# Altium PCB tecctrl.PcbDoc
Units mil, origin at the board's own origin, x right, y up, seen from the top; angles counter-clockwise.
Board outline 3900 x 3000 mil, 2 copper layers (Top Layer, Bottom Layer); 56 components, 34 nets, 150 pads, 17 vias.
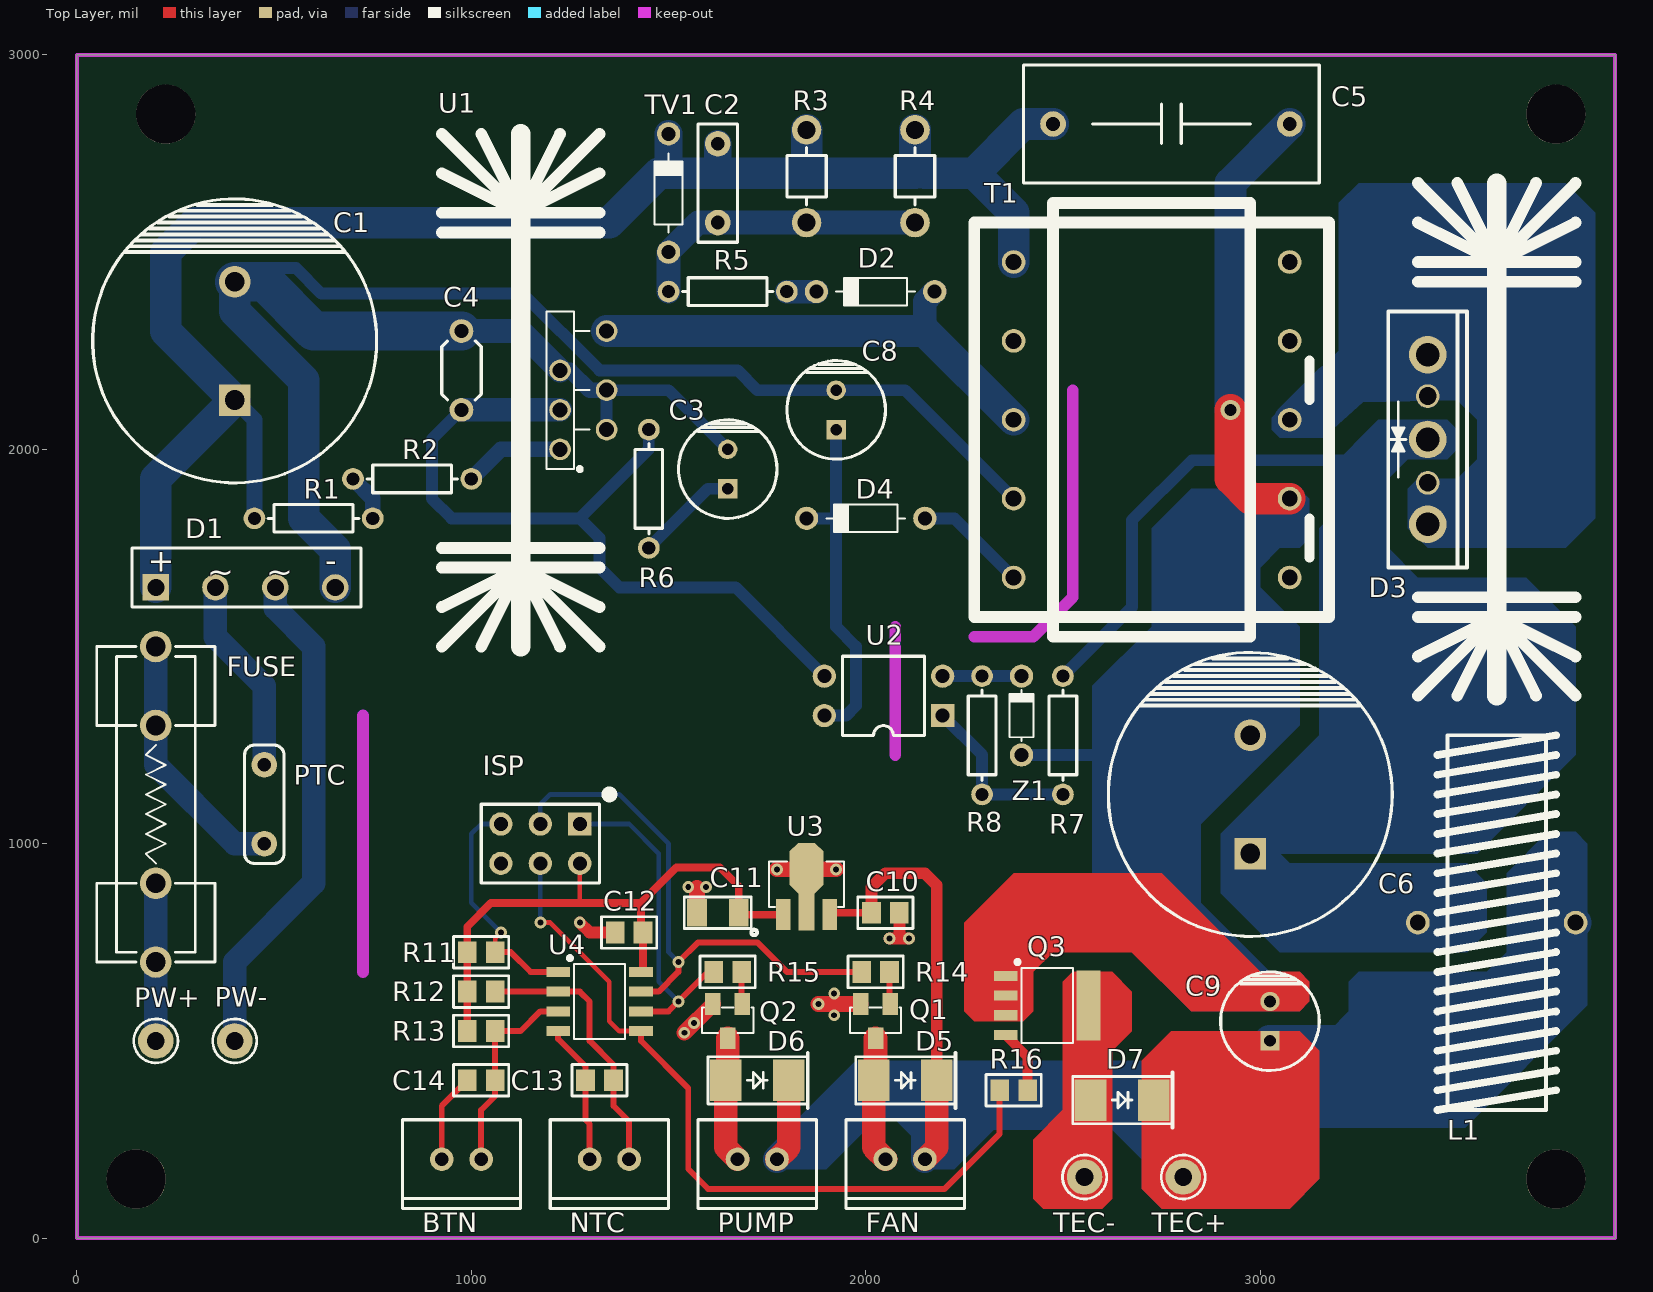
[diagram p0: Top Layer view]
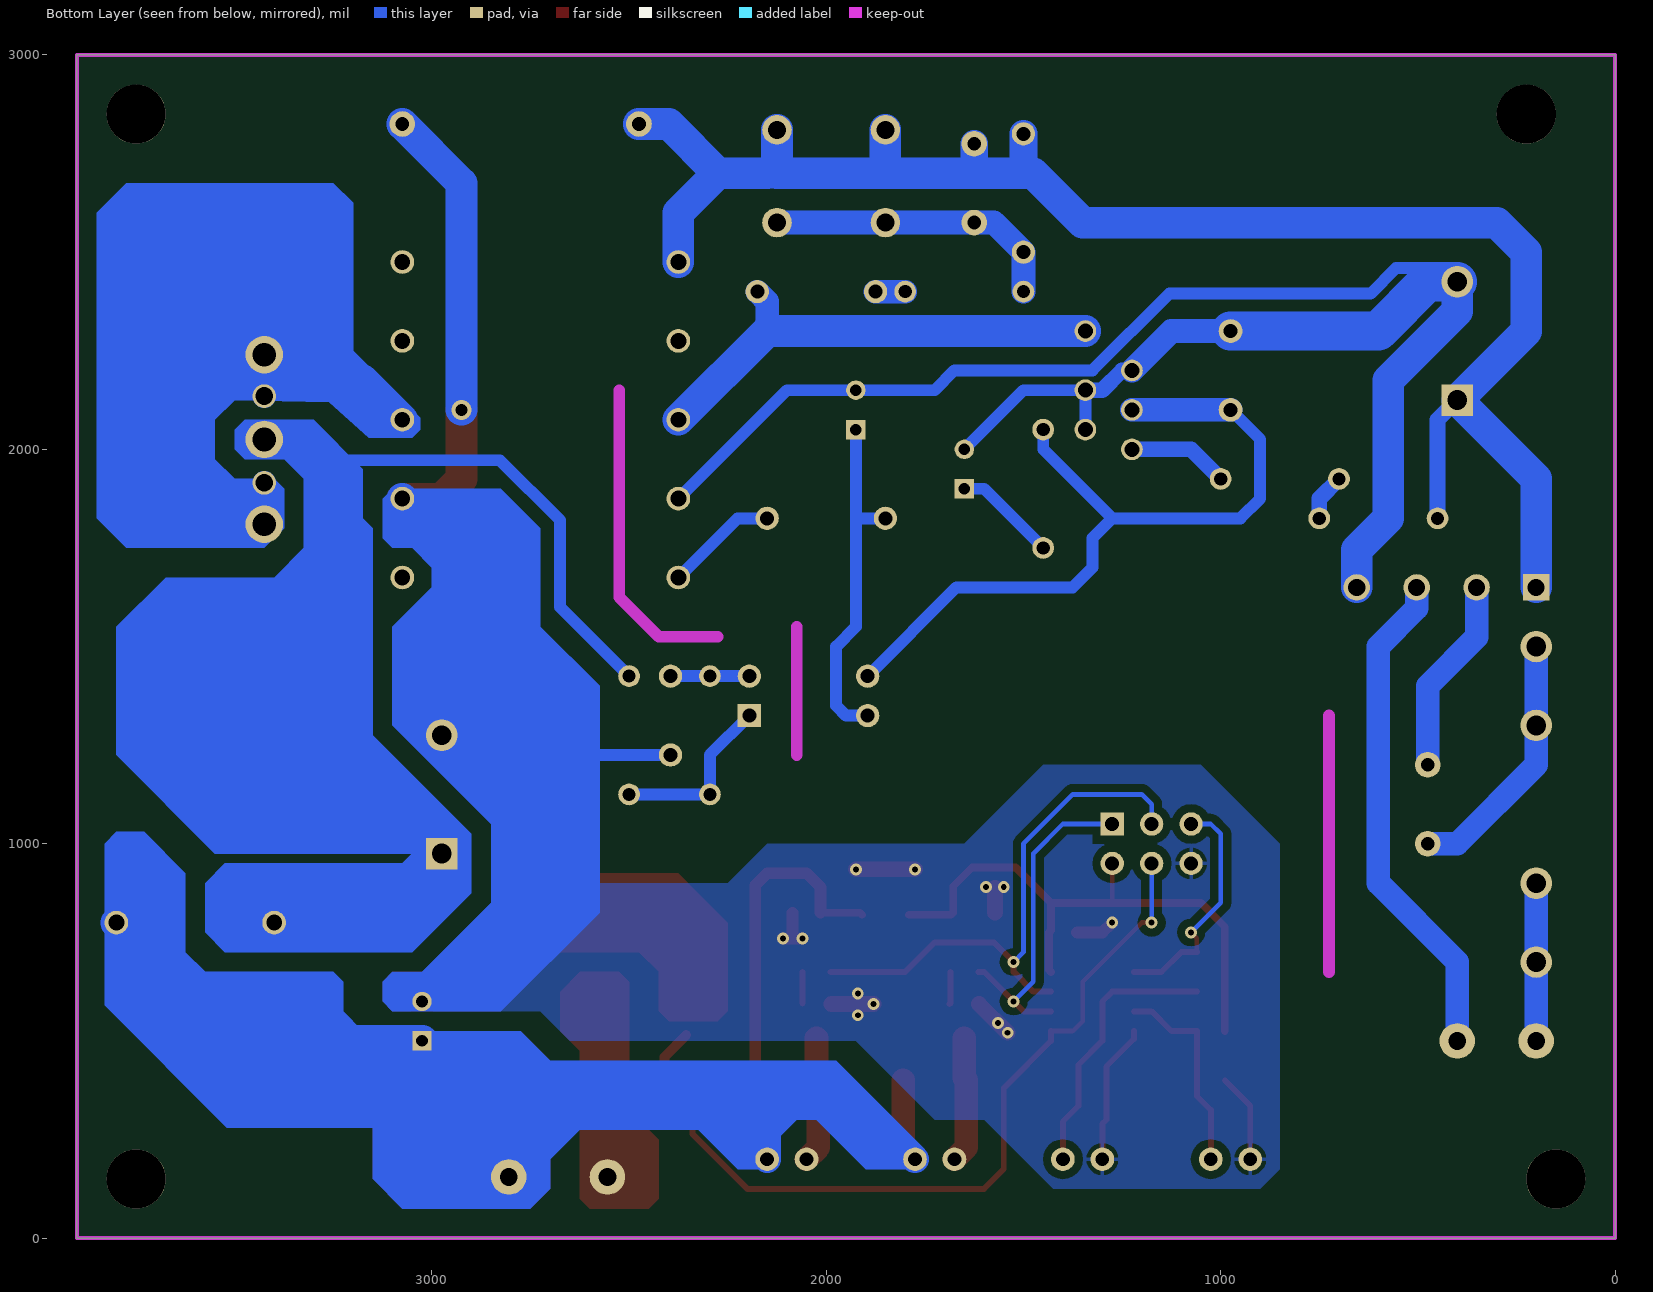
[diagram p1: Bottom Layer view, seen from below]

## Layer stack, top to bottom
Top Layer: signal copper 1.4
Dielectric: dielectric 12.6, FR-4, Dk 4.8
Bottom Layer: signal copper 1.4

## Board outline
0,0 3900,0 3900,3000 0,3000 0,0

## Design rules (kind name [scope] priority, off if disabled: settings)
Clearance [All] p1: gap=10
Height [All] p1: minheight=0 maxheight=2000 prefheight=500
HoleSize [All] p1: absolutevalues=TRUE maxlimit=200 minlimit=5 maxpercent=80.000 minpercent=20.000
MinimumSolderMaskSliver [All] p1: minsoldermaskwidth=5
PolygonConnect [All] p1: connectstyle=Relief reliefconductorwidth=10 reliefentries=4 polygonreliefangle="90 Angle" airgapwidth=10
RoomDefinition power [InComponentClass('power')] p1: confinementstyle=ConfineOut formatcopy=TRUE lockcomponents=FALSE outline 4000,1400 4600,1400 4600,2400 4000,2400
RoomDefinition control [InComponentClass('control')] p2: confinementstyle=ConfineOut formatcopy=TRUE lockcomponents=FALSE outline 4000,0 4600,0 4600,1000 4000,1000
RoutingVias [All] p1: holewidth=28 width=50 viastyle="Through Hole" minholewidth=28 minwidth=50 maxholewidth=28 maxwidth=50
SilkToSilkClearance [All] p1 off: silktosilkclearance=10
SilkToSolderMaskClearance [IsPad] p1 off: minsilkscreentomaskgap=1 clearancetoexposedcopper=TRUE
SolderMaskExpansion [All] p1: expansion=4
Width [All] p1: maxlimit=200 minlimit=10 preferedwidth=10
23 further rules are at their usual default settings.

## Classes and differential pairs
component class power: C1 C3 C4 C5 C6 C8 C9 D1 D2 D3 D4 FUSE L1 PTC PW+ PW- R1 R2 R3 R4 R5 R6 R7 R8 T1 TV1 U1 U2 Z1
component class control: BTN C10 C11 C12 C13 C14 D5 D6 D7 FAN ISP NTC PUMP Q1 Q2 Q3 R11 R12 R13 R14 R15 R16 TEC+ TEC- U3 U4

## Components (designator, comment, footprint, x,y, rotation, side; value= is the part's Value field where it differs from the comment)
BTN "" JST2 975,200 r180 top
C1 "450V68uF" CAP_18x30 400,2275 r90 top
C2 "3.9n1kV" CAP7 1625,2675 r270 top
C3 "47u10V" CAP3 1650,1950 r90 top
C4 "0.1u16V" CAP6 975,2200 r90 top
C5 "330nF" CAP_MKP 2775,2825 r0 top
C6 "2200uF25V" CAP_18x30 2975,1125 r90 top
C8 "10u50V" CAP3 1925,2100 r90 top
C9 "100uF25V" CAP3 3025,550 r90 top
C10 "50V0.1uF" CAP0805 2050,825 r0 top
C11 "10uF16V" CAP1206 1625,825 r180 top
C12 "50V0.1uF" CAP0805 1400,775 r180 top
C13 "50V0.1uF" CAP0805 1325,400 r180 top
C14 "50V0.1uF" CAP0805 1025,400 r180 top
D1 "KBP210" KBP310 200,1650 r0 top
D2 "FR107" DIO1 2025,2400 r180 top
D3 "MBR2080CT" TO247_TO220_SINK 3425,2025 r270 top
D4 "FR107" DIO1 2000,1825 r180 top
D5 "FR107" DO214AC 2100,400 r0 top
D6 "FR107" DO214AC 1725,400 r0 top
D7 "FR107" DO214AC 2650,350 r0 top
FAN "" JST2 2100,200 r180 top
FUSE "5A" FUSE5X20 200,700 r90 top
ISP "Header 3X2" HDR2X3 1275,1050 r180 top
L1 "4.7uH" CHOKE 3600,800 r0 top
NTC "" JST2 1350,200 r180 top
PTC "10D-9" PTC 475,1100 r90 top
PUMP "" JST2 1725,200 r180 top
PW+ "" PAD1 200,500 r0 top
PW- "" PAD1 400,500 r0 top
Q1 "SI2302" SOT23_NMOS 2025,550 r180 top
Q2 "SI2302" SOT23_NMOS 1650,550 r180 top
Q3 "FDS6690AS" SO8-NMOS 2460,590 r270 top
R1 "4.7M" RES0.25W 600,1825 r180 top
R2 "4.7M" RES0.25W 850,1925 r180 top
R3 "29k2W" RES2W_H 1850,2575 r90 top
R4 "29k2W" RES2W_H 2125,2575 r90 top
R5 "5.1R" RES0.25W 1650,2400 r180 top
R6 "6.8" RES0.25W 1450,1900 r90 top
R7 "230R" RES0.25W 2500,1275 r90 top
R8 "1K" RES0.25W 2295,1275 r270 top
R11 "4.7K" RES0805 1025,725 r180 top
R12 "4.7K" RES0805 1025,625 r180 top
R13 "4.7K" RES0805 1025,525 r180 top
R14 "10R" RES0805 2025,675 r180 top
R15 "10R" RES0805 1650,675 r180 top
R16 "10R" RES0805 2375,375 r180 top
T1 "Transformer" EER28 2725,2075 r0 top
TEC+ "" PAD1 2805,155 r270 top
TEC- "" PAD1 2555,155 r270 top
TV1 "P6KE180A" DIO1 1500,2650 r90 top
U1 "TOP266EG" ESIP_SINK 1225,2100 r90 top
U2 "PC817" DIP-4 2045,1375 r90 top
U3 "" SOT89_VREG 1850,820 r0 top
U4 "TINY13A" SO8 1325,600 r270 top
Z1 "12V" DIO2 2395,1325 r90 top

## Footprints (in the part's own frame and the unit in brackets; to place one, negate y for a bottom-side part, rotate by r counter-clockwise, add the part's x,y. Pads: shape width x height; smd on the part's side, far side on the other; paste and mask are expansions set on the pad)
CAP3 [mm] "Capacitor, Electrolytic, Radial; Body 5 x 6.8 mm (Dia.xH typ); Pin Spacing 2 mm (typ)"
  rect 1.25x1.25 hole 0.75: 1(-1.27,0)
  round 1.25 hole 0.75: 2(1.27,0)
  silkscreen extent -3.17,-3.18 3.17,3.17, body extent -3.18,-3.18 3.18,3.18, height 11.53
CAP6 [mil]
  round 60 hole 35: 1(-100,0) 2(100,0)
  silkscreen extent -75,-50 75,50, body extent -108,-50 108,48, height 257
CAP7 [mm]
  round 1.65 hole 0.889: 1(-2.54,0) 2(2.54,0)
  silkscreen extent -3.81,-1.27 3.81,1.27, body extent -4,-1.27 4,1.24, height 10.86
CAP0805 [mm]
  rect 1.2x1.4 smd: 1(-0.9,0) 2(0.9,0)
  silkscreen extent -1.78,-1.02 1.78,1.02, body extent -1,-0.62 1,0.63, height 0.78
CAP1206 [mil]
  rect 50x70 smd: 1(-53,0) 2(53,0)
  silkscreen extent -99,-40 85,57, body extent -67,-33 67,33, height 67
CAP_18x30 [mil]
  rect 80x80 hole 50: 1(-150,0)
  round 80 hole 50: 2(150,0)
  silkscreen extent -360,-360 360,360, body extent -353,-354 356,354, height 1183
CAP_MKP [mm]
  round 1.65 hole 0.889: 1(-7.62,0) 2(7.62,0)
  silkscreen extent -9.53,-3.81 9.53,3.81, body extent -9.5,-4 9.5,4, height 16.67
CHOKE [mil]
  round 60 hole 40: 1(-200,0) 2(200,0)
  silkscreen extent -150,-475 150,475, body extent -234,-500 236,500, height 1100
DIO1 [mm]
  round 1.5 hole 0.9: 1(-3.81,0) 2(3.81,0)
  silkscreen extent -2.54,-0.89 2.54,0.89, body extent -4.22,-1.33 4.19,1.33, height 3.06
DIO2 [mm]
  round 1.5 hole 0.9: 1(-2.54,0) 2(2.54,0)
  silkscreen extent -1.65,-0.76 1.65,0.76, body extent -2.74,-0.84 2.77,0.81, height 1.81
DIP-4 [mm] "DIP; 4 Leads; Row Spacing 7.62 mm; Pitch 2.54 mm"
  rect 1.5x1.5 hole 0.9: 1(-1.27,-3.81)
  round 1.5 hole 0.9: 2(1.27,-3.81) 3(1.27,3.81) 4(-1.27,3.81)
  silkscreen extent -2.55,-2.65 2.55,2.65, body extent -2.75,-3.94 2.79,4.06, height 5.58
DO214AC [mil]
  rect 80x105 smd: 1(-80,0) 2(80,0)
  silkscreen extent -125,-70 128,70, body extent -108,-55 108,55, height 90
EER28 [mil]
  round 60 hole 40: 1(-350,400) 2(-350,200) 3(-350,0) 4(-350,-200) 5(-350,-400) 6(350,-400) 7(350,-200) 8(350,0) 9(350,200) 10(350,400)
  silkscreen extent -450,-550 450,550, body extent -370,-510 370,514, height 937
ESIP_SINK [mil] "TopSwitch JX"
  round 55 hole 38: 1(-100,0) 2(-50,-118.11) 3(0,0) 4(50,-118.11) 5(100,0) 7(200,-118.11)
  silkscreen extent -600,-100 700,300, body extent -616,-140 715,317, height 994
FUSE5X20 [mil]
  round 80 hole 50: 1(0,0) 1(200,0) 2(600,0) 2(800,0)
  silkscreen extent 0,-150 800,150, body extent -10,-152 810,152, height 457
HDR2X3 [mm] "Connector; Header; 3x2 Position"
  rect 1.5x1.5 hole 0.9: 1(0,0)
  round 1.5 hole 0.9: 2(0,2.54) 3(2.54,0) 4(2.54,2.54) 5(5.08,0) 6(5.08,2.54)
  silkscreen extent -2.16,-2.16 6.35,3.81, body extent -1.27,-1.27 6.35,3.81, height 8.79
JST2 [mil]
  round 60 hole 35: 1(-50,0) 2(50,0)
  silkscreen extent -150,-100 150,125, body extent -149,-94 146,134, height 281
KBP310 [mm]
  rect 1.7x1.7 hole 1.1: 1(0,0)
  round 1.7 hole 1.1: 2(3.835,0) 3(7.696,0) 4(11.557,0)
  silkscreen extent -1.52,-1.27 13.21,2.54, body extent -2.03,-1.62 13.97,2.38, height 13.54
PAD1 [mil]
  round 90 hole 45: 1(0,0)
  silkscreen extent -56,-56 56,56
PTC [mm]
  round 1.65 hole 0.889: 1(-2.54,0) 2(2.54,0)
  silkscreen extent -3.81,-1.27 3.81,1.27, body extent -3.96,-2.81 4.03,2.79, height 11.97
RES0.25W [mm] "Resistor; 2 Leads"
  round 1.4 hole 0.85: 1(-3.81,0) 2(3.81,0)
  silkscreen extent -2.92,-0.89 2.92,0.89, body extent -4.06,-0.93 4.06,1.02, height 2.24
RES2W_H [mil] "Resistor; 2 Leads"
  round 75 hole 45: 1(0,0) 2(235,0)
  silkscreen extent 45,-50 190,50, body extent -71,-130 260,130, height 936
RES0805 [mm]
  rect 1.2x1.4 smd: 1(-0.9,0) 2(0.9,0)
  silkscreen extent -1.78,-1.02 1.78,1.02, body extent -1.12,-0.69 1.18,0.66, height 0.76
SO8 [mil]
  rect 25.59x60 smd: 1(-75,-105) 2(-25,-105) 3(25,-105) 4(75,-105) 5(75,105) 6(25,105) 7(-25,105) 8(-75,105)
  silkscreen extent -115,-80 95,65, body extent -96,-118 96,118, height 67
SO8-NMOS [mil]
  rect 177.17x60 smd: D(0,105)
  rect 25.59x60 smd: G(75,-105) S(-75,-105) S(-25,-105) S(25,-105)
  silkscreen extent -115,-80 95,65, body extent -96,-118 96,118, height 67
SOT23_NMOS [mm]
  rect 1x1.4 smd: D(0,1.1) G(-0.95,-1.1) S(0.95,-1.1)
  silkscreen extent -1.65,-0.89 1.65,0.76, body extent -1.5,-1.32 1.5,1.32, height 1.08
SOT89_VREG [mm]
  rect 0.92x2 smd: 1(-1.5,0) 3(1.5,0)
  rect 1.016x2.54 smd: 2(0,0.254)
  oct 2.184x3.251 smd: 2(0,3)
  silkscreen extent -2.41,0.51 2.41,3.43, body extent -2.21,-0.37 2.29,3.93, height 1.51
TO247_TO220_SINK [mil]
  round 95 hole 60: 1(-215,0) 2(0,0) 3(215,0)
  round 60 hole 45: 1(-110,0) 3(110,0)
  silkscreen extent -650,-100 650,375, body extent -665,-94 665,390, height 1484

## Part data
BTN FAN NTC PUMP: library part "Header 2", "Header, 2-Pin"
C1 C3 C6 C8 C9 C11: library part "Cap Pol2", "Polarized Capacitor (Axial)"
C2 C4 C5 C10 C12 C13 C14: library part Cap, "Capacitor"
D1: library part KBP310, "Single Phase Rectifier Bridge"
D2 D4 D5 D6 D7: library part Diode, "1 Amp Fast Recovery Rectifier"
D3: library part Diode2, "Dual Diode TO-247"
FUSE: library part "Fuse 2", "Fuse"
ISP: "Header, 3-Pin, Dual row"
L1: library part Inductor, "Inductor"
PTC R1 R2 R3 R4 R5 R6 R7 R8 R11 R12 R13 R14 R15 R16: library part Res1, "Resistor"
PW+ PW- TEC+ TEC-: library part Header1, "Header, 1-Pin"
Q1 Q2 Q3: library part NMOS, "DUAL MOSFET N"
T1: library part EER28
TV1 Z1: library part "D Zener", "Zener Diode"
U1: library part TOP26xEG, "PI TopSwitch II"
U2: library part Optoisolator1, "4-Pin Phototransistor Optocoupler"
U3: library part 78L05, "Positive Voltage Regulator"
U4: "AVR MCU"

## Free pads (board coordinates)
  round 150 hole 150: ""(150,150) ""(225,2850) ""(3750,150) ""(3750,2850)

## Via types
v1: diameter 30, hole 15, Top Layer to Bottom Layer, 16 vias
v2: diameter 50, hole 30, Top Layer to Bottom Layer, 1 vias

## Nets (pads, with @x,y where several pads share a name; then routed paths per layer and width w, separated by ;. In a path a pad name is that pad's centre, name@x,y a point inside that pad or via, vN(x,y) a via of type N, cw(c..) or ccw(c..) an arc to the next point about the centre after c; other vN are vias at no path point)
5V: C11.1 C12.1 ISP.2 R11.2 R12.2 R13.2 U3.1 U4.8 | length 1496.7
  Top Layer w12: 1275,850 ISP.2
  Top Layer w20: R13.2 R12.2 R11.2 989.57,789.57 1050,850 1275,850 1430,850 ; U4.8 1435.43,680.43 C12.1 1430,780.43 1430,850 ; U3.1 1683,820 C11.1 1678,892 1630,940 1520,940 1430,850
12V: C9.1 C10.1 D5.2 D6.2 D7.2 FAN.1 L1.2 PUMP.1 TEC+.1 U3.3 | length 2892.7
  Top Layer w20: U3.3 1914.06,825 C10.1
  Top Layer w30: C10.1 2014.57,889.57 2050,925 2150,925 2180,895 D5.2
  Top Layer w60: PUMP.1 1805,230 D6.2 ; FAN.1 2180,230 D5.2
  Top Layer w80: D7.2 2805,275 TEC+.1
  Bottom Layer w70: PUMP.1 1975,400 ; FAN.1 2150,400
  Bottom Layer w80: C9.1 3500,500 L1.2
GND: BTN.2 C5.2 C6.2 C9.2 C10.2 C11.2 C12.2 C13.2 C14.2 ISP.6 NTC.2 Q1.S Q2.S Q3.S T1.7 U3.2 U4.4 Z1.1 | length 3615.8
  Top Layer w15: BTN.2 925,335.43 C14.2 ; U4.4 1220,505 1289.57,435.43 C13.2 1289.57,300 1300,289.57 NTC.2
  Top Layer w30: v1(1275,800) 1300,775 C12.2 ; v1(2060,760) v1(2110,760) ; 2085.43,760.43 C10.2
  Top Layer w40: v1(1540,520.71) Q2.S ; C11.2 1572,888 ; v1(1775,935) v1(1925,935) ; v1(1880,593.31) Q1.S
  Top Layer w80: v2(2925,2100) 2925,1925 2975,1875 T1.7
  Bottom Layer w30: Z1.1 2775,1225 2900,1350
  Bottom Layer w80: v2(2925,2100) 2925,2675 C5.2 ; C6.2 2900,1350 2900,1700 T1.7
  other v1: 1565,545.71 1920,565 1920,620 1550,890 1595,890
MISO: ISP.1 R15.2 U4.6 | length 852.8
  Top Layer w15: U4.6 1500,575 v1(1525,600) 1600,675 R15.2
  Bottom Layer w12: ISP.1 1400,1050 1475,975 1475,650 v1(1525,600)
MOSI: ISP.4 R16.2 U4.5 | length 1955.7
  Top Layer w12: v1(1175,800) 1200,800 1350,650 1350,550 1375,525 U4.5
  Top Layer w15: U4.5 1430,500 1550,380 1550,175 1600,125 2200,125 2339.57,264.57 R16.2
  Bottom Layer w12: v1(1175,800) ISP.4
NetBTN_1: BTN.1 C14.1 R13.1 U4.3 | length 520
  Top Layer w15: BTN.1 1025,325 1060.43,360.43 C14.1 R13.1 1125,525 1175,575 U4.3
NetC1_1: C1.1 C2.1 C5.1 D1.1 R1.2 R3.2 R4.2 T1.1 TV1.2 | length 4324.2
  Bottom Layer w40: C1.1@400,2112.5 412.5,2112.5 450,2075 R1.2
  Bottom Layer w70: 1500,2700 TV1.2 ; 1625,2700 C2.1
  Bottom Layer w80: D1.1 200,1925 C1.1@387.5,2112.5 ; C1.1 225,2300 225,2500 300,2575 1350,2575 1475,2700 1850,2700 ; R3.2 1850,2700 ; R4.2 2125,2700 1850,2700 ; 2150,2700 2275,2700 ; T1.1 2375,2600 2275,2700 ; C5.1 2400,2825 2275,2700
NetC1_2: C1.2 C3.2 C4.2 C8.2 D1.4 T1.4 U1.2 U1.4 U1.5 | length 4638.5
  Bottom Layer w30: C1.2 435,2460 555,2460 620,2395 1130,2395 1325,2200 1675,2200 1725,2150 C8.2 2100,2150 T1.4 ; U1.2 U1.4 1500,2150 C3.2
  Bottom Layer w40: U1.5 1250,2200 1300,2150 U1.4
  Bottom Layer w60: C4.2 1125,2300 U1.5
  Bottom Layer w80: C1.2 400,2350 575,2175 575,1825 655,1745 D1.4
  Bottom Layer w100: C1.2 475,2425 600,2300 C4.2
NetC2_2: C2.2 R3.1 R4.1 R5.2 TV1.1 | length 756.1
  Bottom Layer w60: R5.2 TV1.1 1575,2575 1650,2575 R3.1 R4.1
NetC3_1: C3.1 R6.1 | length 262.1
  Bottom Layer w30: R6.1 1600,1900 C3.1
NetC4_1: C4.1 R6.2 U1.3 U2.3 | length 2028.9
  Bottom Layer w30: C4.1 900,2025 900,1875 950,1825 1275,1825 ; R6.2 1450,2000 1275,1825 ; U2.3 1670,1650 1375,1650 1325,1700 1325,1775 1275,1825
  Bottom Layer w60: C4.1 U1.3
NetC6_1: C6.1 D3.2 L1.1 R7.2 | length 2920.6
  Bottom Layer w30: R7.2 2675,1600 2675,1820 2827.5,1972.5 3272.5,1972.5
  Bottom Layer w80: L1.1 3150,800 C6.1 3225,1225 3225,1925 3272.5,1972.5 3325,2025 D3.2
NetC8_1: C8.1 D4.2 U2.4 | length 886.1
  Bottom Layer w30: D4.2 1925,1825 ; U2.4 1950,1325 1975,1350 1975,1500 1925,1550 1925,1825 ; C8.1 1925,1825
NetC13_1: C13.1 NTC.1 R12.1 U4.2 | length 691.3
  Top Layer w15: R12.1 1275,625 1300,600 1300,500 1360.43,439.57 C13.1 1360.43,335.43 1400,295.87 NTC.1
NetD1_2: D1.2 PTC.2 | length 501.4
  Bottom Layer w60: D1.2 351,1524 475,1400 PTC.2
NetD1_3: D1.3 PW-.1 | length 1273
  Bottom Layer w60: PW-.1 400,700 600,900 600,1500 503,1597 D1.3
NetD2_1: D2.1 T1.3 U1.7 | length 1235.4
  Bottom Layer w60: 2150,2300 2150,2375 D2.1
  Bottom Layer w80: U1.7 2150,2300 T1.3
NetD2_2: D2.2 R5.1 | length 75
  Bottom Layer w60: R5.1 D2.2
NetD3_1: D3.1 D3.3 T1.8 | length 1213.6
  Bottom Layer w60: D3.3@3425,1810 3425,1875 D3.3@3425,1915 ; D3.1@3425,2135 3425,2175 D3.1@3425,2240
  Bottom Layer w80: T1.8 3175,2175 3425,2175 3550,2175 3625,2100 3625,1950 3550,1875 3425,1875
NetD4_1: D4.1 T1.5 | length 287.1
  Bottom Layer w30: D4.1 2225,1825 T1.5
NetD5_1: D5.1 FAN.2 Q1.D | length 321.2
  Top Layer w60: Q1.D 2025,405 D5.1 2020,230 FAN.2
NetD6_1: D6.1 PUMP.2 Q2.D | length 321.2
  Top Layer w60: Q2.D 1650,405 D6.1 1645,230 PUMP.2
NetD7_1: D7.1 Q3.D TEC-.1 | length 201.2
  Top Layer w80: TEC-.1 2555,335 D7.1
NetFUSE_1: FUSE.1 PW+.1 | length 400
  Bottom Layer w60: PW+.1 200,700 FUSE.1@200,900
NetFUSE_2: FUSE.2 PTC.1 | length 657.8
  Bottom Layer w60: FUSE.2@200,1500 200,1300 200,1200 400,1000 PTC.1
NetQ1_G: Q1.G R14.1 | length 79.7
  Top Layer w15: Q1.G@2060.43,595.28 R14.1
NetQ2_G: Q2.G R15.1 | length 82.5
  Top Layer w15: R15.1 1685.43,595.28 Q2.G
NetQ3_G: Q3.G R16.1 | length 163
  Top Layer w25: Q3.G 2410.43,459.57 R16.1
NetR1_1: R1.1 R2.2 | length 120.7
  Bottom Layer w40: R2.2 750,1875 R1.1
NetR2_1: R2.1 U1.1 | length 256.1
  Bottom Layer w40: R2.1 1075,2000 U1.1
NetR7_1: R7.1 R8.2 U2.1 | length 446.4
  Bottom Layer w30: U2.1 2295,1225 R8.2 R7.1
NetR8_1: R8.1 U2.2 Z1.2 | length 200
  Bottom Layer w30: U2.2 Z1.2
RST: ISP.5 R11.1 U4.1 | length 602.7
  Top Layer w12: R11.1 1060.43,760.43 v1(1075,775)
  Top Layer w15: R11.1 1100,725 1150,675 U4.1
  Bottom Layer w12: v1(1075,775) 1000,850 1000,1025 1025,1050 ISP.5
SCK: ISP.3 R14.2 U4.7 | length 1404.5
  Top Layer w15: U4.7 1475,625 1525,675 v1(1525,700) 1575,750 1725,750 1800,675 R14.2
  Bottom Layer w12: ISP.3 1175,1100 1200,1125 1375,1125 1500,1000 1500,725 v1(1525,700)
pads on no net: T1.2 T1.6 T1.9 T1.10

## Polygon pours and split planes (outlines as drawn)
GND on Bottom Layer "Bottom Layer-No Net" (solid, remove dead copper, pour order 2): 3100,675 3125,650 3125,600 3100,575 2725,575 2650,500 1925,500 1725,300 1600,300 1425,125 900,125 850,175 850,1000 1050,1200 1450,1200 1650,1000 2150,1000 2250,900 2800,900 3025,675

## Keep-outs
Keep-Out Layer:
  lines w10: 0,0 3900,0 3900,3000 0,3000 0,0
  lines w30: 725,675 725,1325 ; 2075,1225 2075,1550 ; 2275,1525 2425,1525 2525,1625 2525,2150

## Other copper
Top Layer:
  region net 12V: 3100,525 3150,475 3150,150 3075,75 2750,75 2700,125 2700,450 2775,525
  region net NetD7_1: 2525,675 2500,650 2500,325 2425,250 2425,100 2450,75 2600,75 2625,100 2625,475 2675,525 2675,625 2625,675
  region net GND: 3100,675 3125,650 3125,600 3100,575 2825,575 2675,725 2475,725 2425,675 2425,575 2400,550 2275,550 2250,575 2250,800 2375,925 2750,925 3000,675
Bottom Layer:
  region net NetD3_1: 3200,2250 3200,2625 3250,2675 3775,2675 3850,2600 3850,1825 3775,1750 3425,1750 3375,1800 3375,1900 3400,1925 3500,1925 3550,1975 3550,2075 3500,2125 3260,2120 3160,2030 3050,2030 3030,2050 3030,2080
  region net NetC6_1: 3475,2075 3500,2050 3500,2000 3475,1975 3375,1975 3325,1925 3325,1750 3400,1675 3675,1675 3800,1550 3800,1225 3550,975 2950,975 2950,1075 3150,1275 3150,1800 3175,1825 3175,1950 3300,2075
  region net NetC6_1: 2950,1075 2900,1025 2900,875 3050,725 3525,725 3575,775 3575,900 3525,950 3075,950
  region net 12V: 3730,1030 3625,925 3625,725 3575,675 3250,675 3225,650 3225,575 3175,525 3015,525 2990,500 2990,400 3110,280 3520,280 3830,590 3830,1000 3800,1030
  region net GND: 3125,1875 3100,1900 2825,1900 2725,1800 2725,1550 2575,1400 2575,825 2825,575 3100,575 3125,600 3125,650 3100.49,674.51 3025,675 2850,850 2850,1050 3100,1300 3100,1550 3000,1650 3000,1700 3050,1750 3100,1750 3125,1775
  region net 12V: 3100,525 3150,475 3150,150 3075,75 2750,75 2700,125 2700,200 2625,275 2325,275 2225,175 2150,175 2125,200 2125,250 2075,300 2025,300 1900,175 1775,175 1750,200 1750,225 1975,450 2700,450 2775,525

## Text inside footprints (layer, text, board x,y; h text height)
D1: Top Overlay "~" at 330,1660 h59.06; Top Overlay "~" at 480,1660 h59.06; Top Overlay "-" at 630,1690 h59.06; Top Overlay "+" at 180,1690 h59.06